# Altium PCB 1.0EV5.2-PCB.PcbDoc
Units mm, origin at the board's own origin, x right, y up, seen from the top; angles counter-clockwise.
Board outline 152.4 x 101.6 mm, 4 copper layers (Top Layer, Signal Layer 1, Signal Layer 2, Bottom Layer), stack 0.778 mm thick; 113 components, 74 nets, 517 pads, 118 vias.
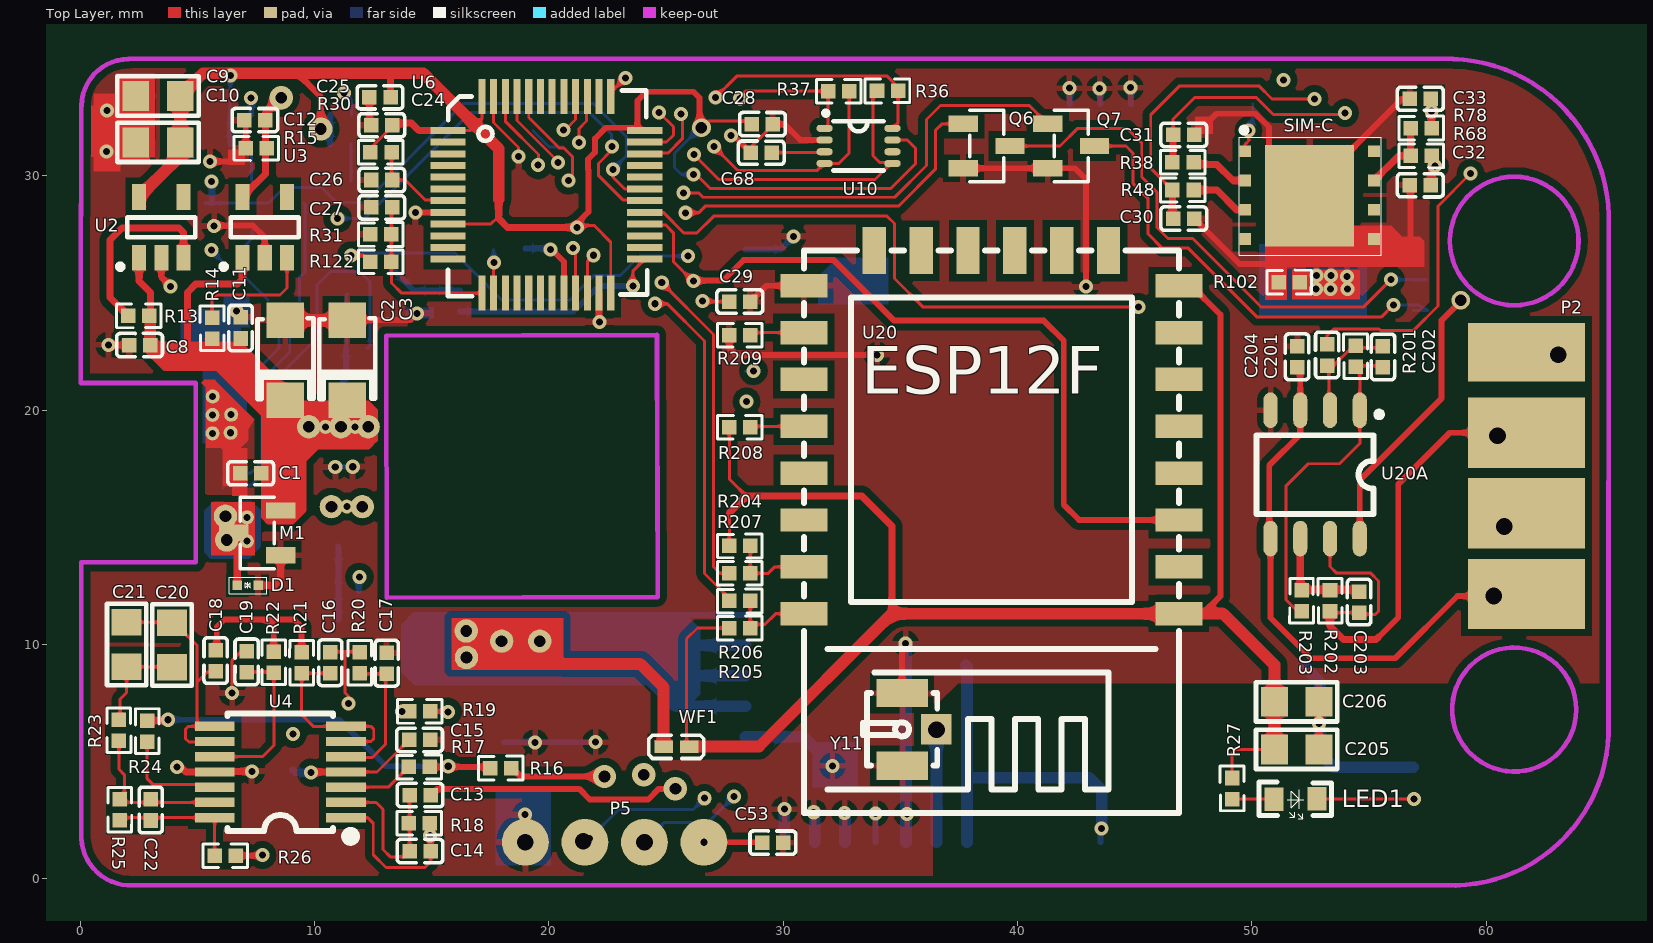
[diagram p0: Top Layer view]
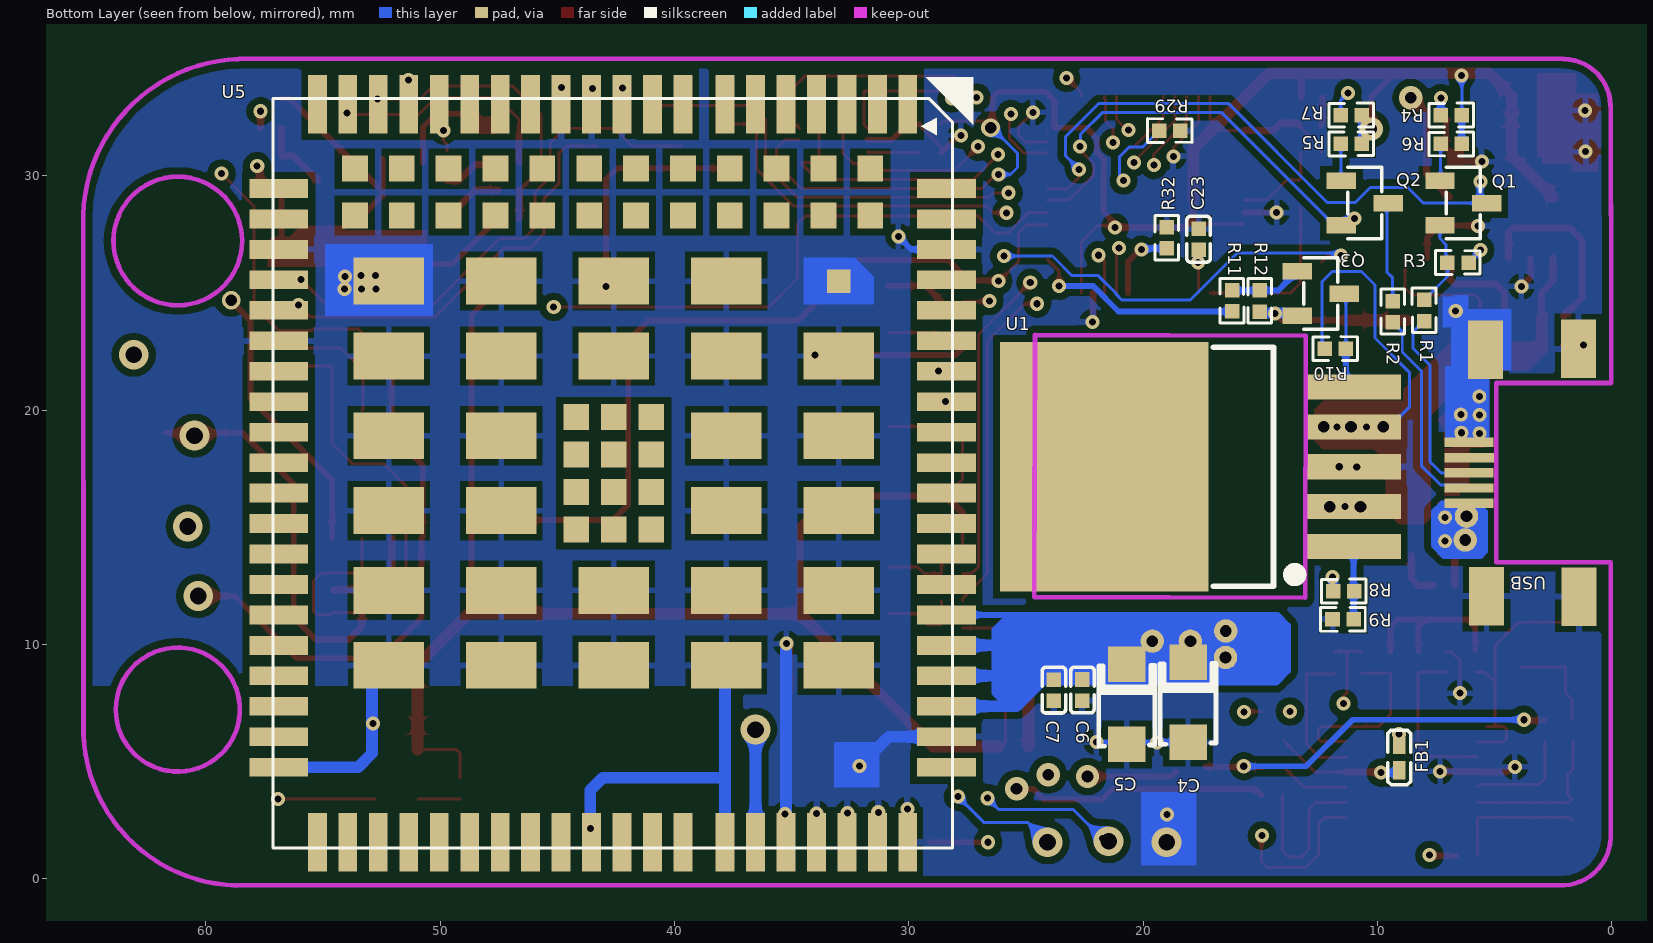
[diagram p1: Bottom Layer view, seen from below]
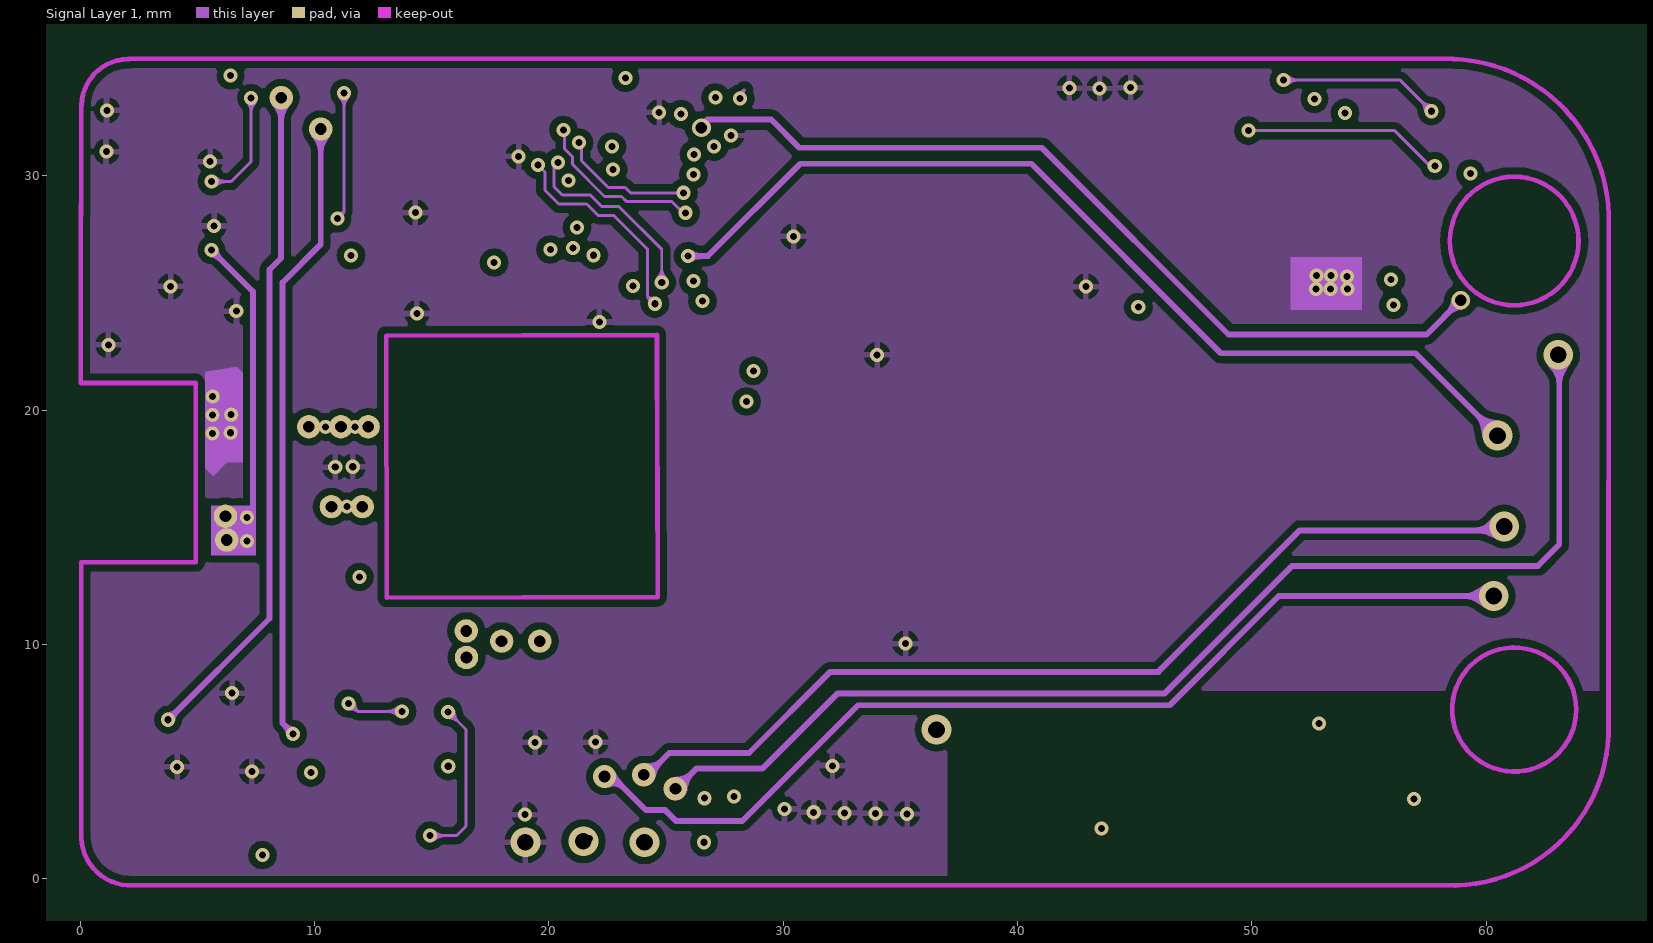
[diagram p2: Signal Layer 1]
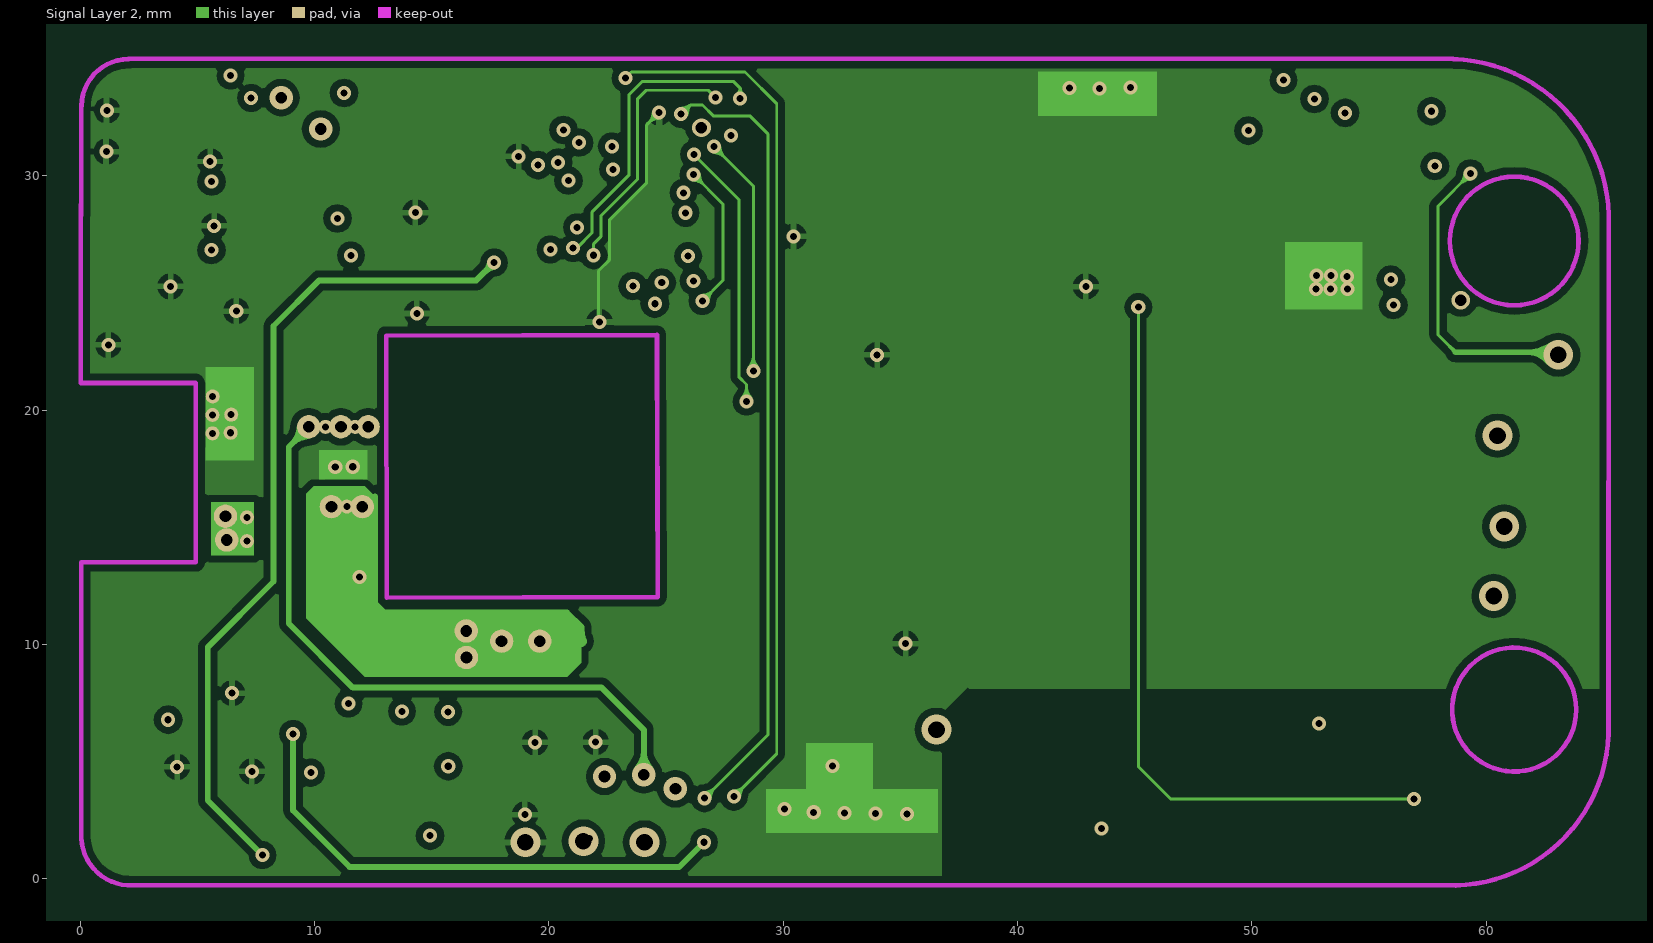
[diagram p3: Signal Layer 2]
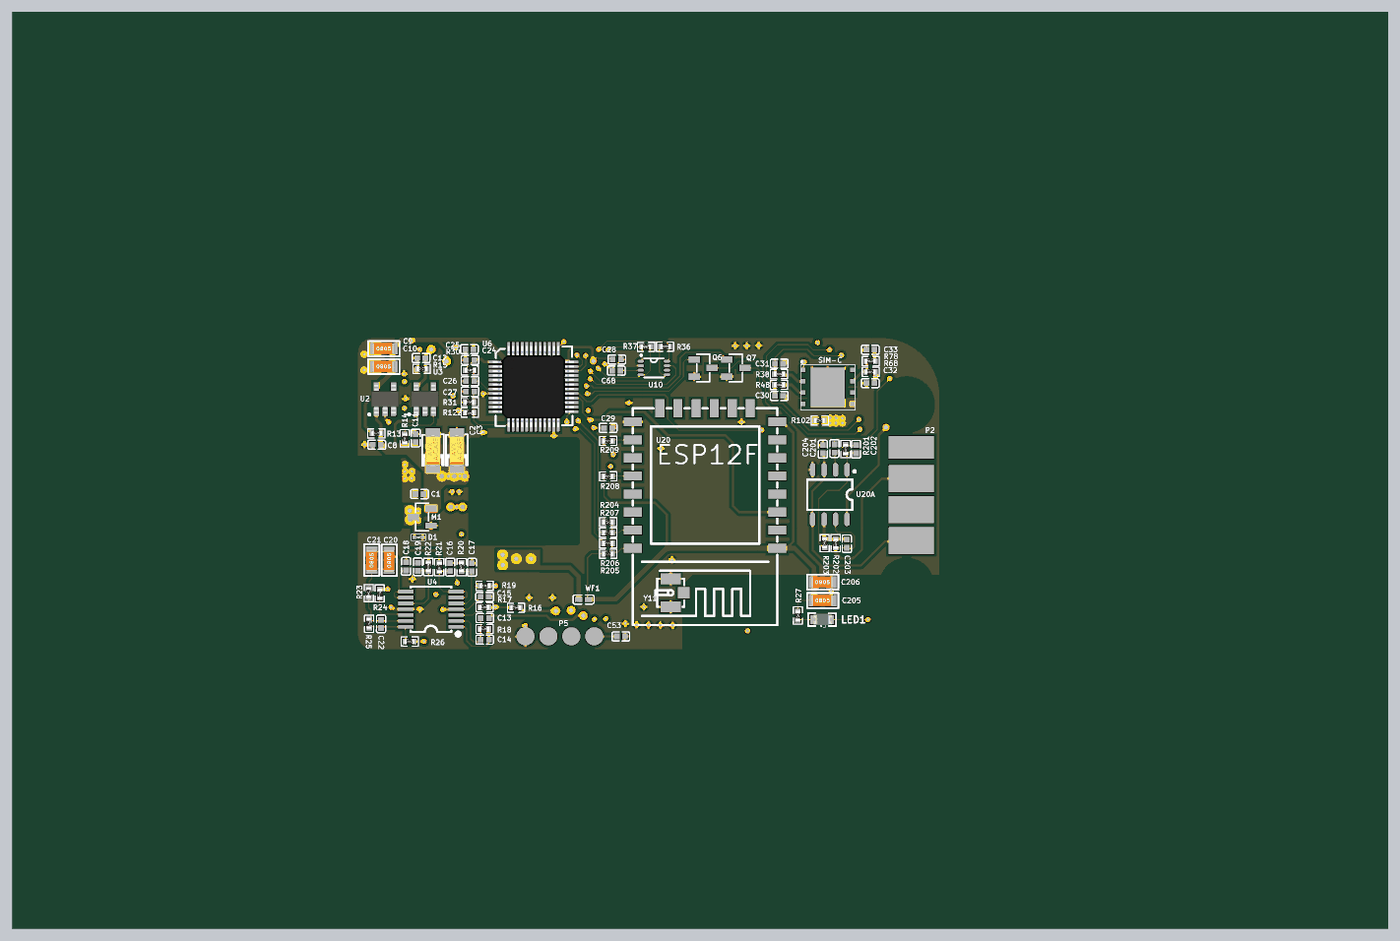
[diagram p4: 3D render of the assembled board from above, using the file's embedded part models]
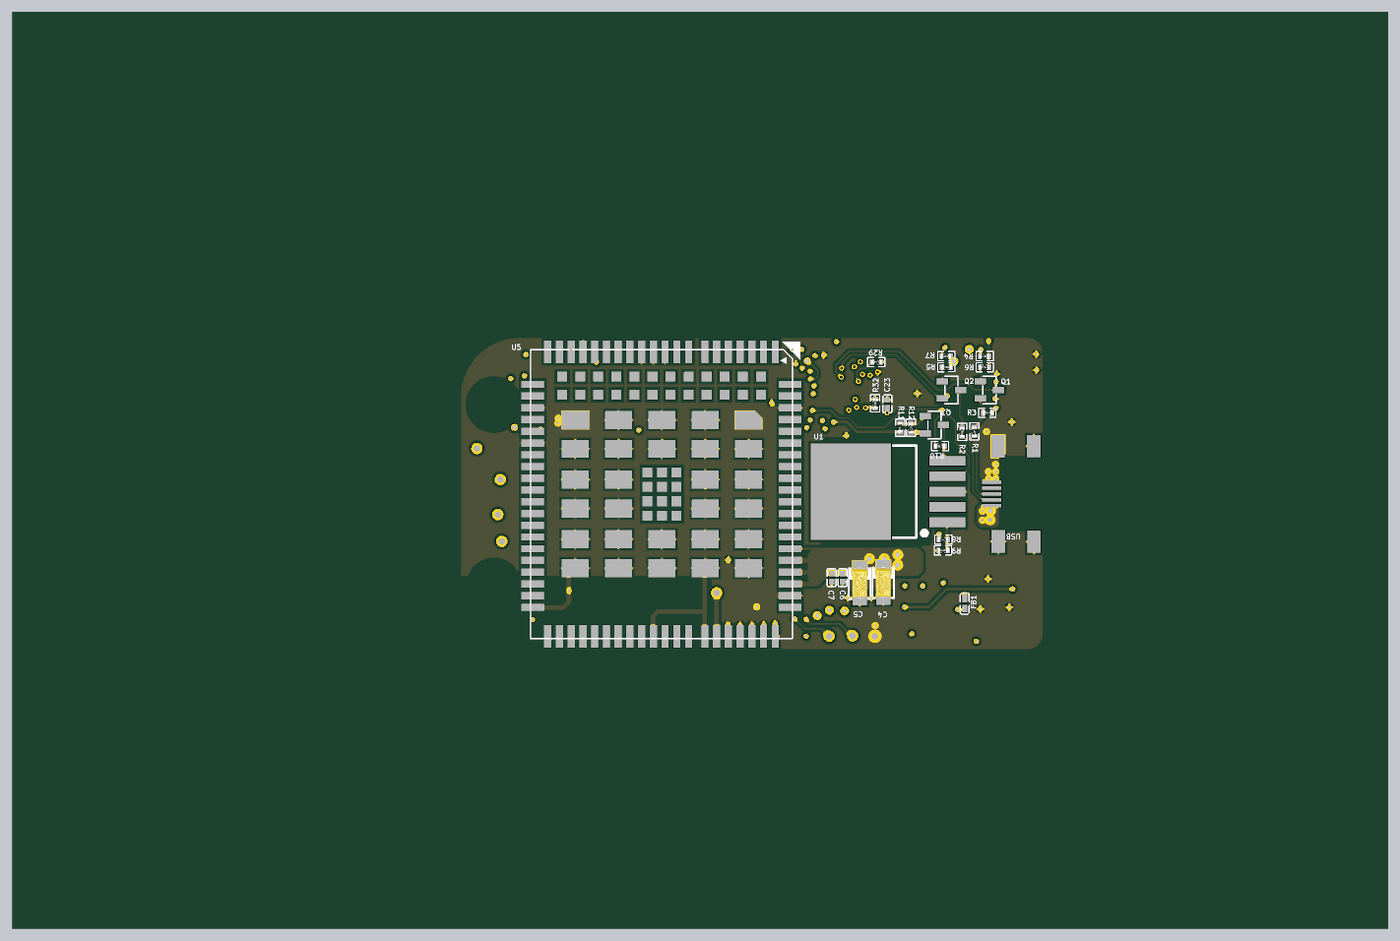
[diagram p5: 3D render of the assembled board from below, using the file's embedded part models]

## Layer stack, top to bottom
Top Solder: solder mask 0.0102, Solder Resist, Dk 3.5
Top Layer: signal copper 0.0356
Dielectric 1: core 0.254, FR-4, Dk 4.2
Signal Layer 1: signal copper 0.036
Dielectric 3: prepreg 0.127, Dk 4.2
Signal Layer 2: signal copper 0.036
Dielectric 2: core 0.254, Dk 4.2
Bottom Layer: signal copper 0.0356
Bottom Solder: solder mask 0.0102, Solder Resist, Dk 3.5

## Board outline
-37.844,-30.849 114.556,-30.849 114.556,70.751 -37.844,70.751

## Design rules (kind name [scope] priority, off if disabled: settings)
Clearance [All] p1: gap=0.3
PolygonConnect [All] p1: connectstyle=Relief reliefconductorwidth=0.254 reliefentries=4 polygonreliefangle="90 Angle" airgapwidth=0.254
RoutingVias [All] p1: holewidth=0.3 width=0.6 viastyle="Through Hole" minholewidth=0.3 minwidth=0.6 maxholewidth=0.3 maxwidth=0.6
SolderMaskExpansion [All] p1: expansion=0.102
Width [All] p1: maxlimit=0.5 minlimit=0.127 preferedwidth=0.25
30 further rules are at their usual default settings.

## Components (designator, comment, footprint, x,y, rotation, side; value= is the part's Value field where it differs from the comment)
C1 "103" C0402 7.284,17.327 r0 top
C2 "47uF/3216" C3216 11.33,22.542 r90 top
C3 "47uF/3216" C3216 8.689,22.542 r90 top
C4 "47uF/3216" C3216 18.015,7.134 r270 bottom
C5 "47uF/3216" C3216 20.627,7.048 r270 bottom
C6 "104" C0402 22.608,8.064 r90 bottom
C7 "103" C0402 23.828,8.061 r90 bottom
C8 "47UF" C0402 2.542,22.796 r0 top
C9 "104" C0805 3.321,33.413 r0 top
C10 "104" C0805 3.321,31.432 r0 top
C11 "47UF" C0402 6.86,23.507 r270 top
C12 "104" C0402 7.462,32.399 r0 top
C13 "10NF" C0402 14.5,3.557 r180 top
C14 "33NF/10V/0402" C0402 14.5,1.17 r180 top
C15 "10NF/10V/0402" C0402 14.492,5.946 r0 top
C16 "33NF" C0402 10.654,9.231 r90 top
C17 "10NF" C0402 13.063,9.212 r90 top
C18 "390NF" C0402 5.763,9.322 r90 top
C19 "33NF" C0402 7.087,9.268 r90 top
C20 "47UF" C0805 3.918,9.979 r90 top
C21 "47UF" C0805 1.98,10.002 r90 top
C22 "3.3NF" C0402 2.993,2.946 r90 top
C23 "10NF" C0402 17.652,27.306 r90 bottom
C24 "0.1uF" C0402 12.799,33.373 r0 top
C25 "0.1uF" C0402 12.877,32.179 r0 top
C26 "104" C0402 12.877,29.843 r0 top
C27 "10NF" C0402 12.877,28.674 r0 top
C28 "0.1uF" C0402 29.11,32.194 r180 top
C29 "0.1uF" C0402 28.145,24.625 r180 top
C30 "33PF_5%_50V_COG" C0402 47.093,28.165 r180 top
C31 "33PF_5%_50V _COG" C0402 47.093,31.737 r180 top
C32 "1UF5%_50v _COG" C0402 57.203,29.619 r0 top
C33 "33PF_5%_50v _COG" C0402 57.203,33.312 r0 top
C53 "104" C0402 29.567,1.562 r0 top
C68 "104" C0402 29.059,30.975 r180 top
C201 "33nF" C0402 53.237,22.352 r270 top
C202 "10NF" C0402 55.618,22.27 r270 top
C203 "10NF" C0402 54.6,11.807 r270 top
C204 "10nF" C0402 51.919,22.288 r90 top
C205 "47uF" C0805 51.919,5.524 r0 top
C206 "22uF" C0805 51.919,7.556 r0 top
D1 "DF2B7AFS/SOD-923" DF2B7AFS 7.114,12.484 r0 top
FB1 "60Ω ±25% @100MHz/0402" "60Ω ±25% @100MHz" 9.095,5.169 r270 bottom
LED1 "RED" LED-0603 51.954,3.434 r180 top
M1 "CES2301" CES2301 7.835,14.818 r0 top locked
P2 "Header 4H" p2 61.259,17.291 r0 top locked
P5 "Header 4H" IO 22.861,1.615 r180 top locked
Q1 "S8050" CES2301 6.616,28.791 r0 bottom locked
Q2 "S8050" CES2301 10.822,28.791 r0 bottom
Q3 "0805" CES2301 12.702,24.93 r0 bottom locked
Q6 "PDTC114YE" CES2301 38.407,31.229 r180 top
Q7 "PDTC114YE" CES2301 42.013,31.229 r180 top
R1 "51R" R0402 7.977,24.269 r270 bottom
R2 "51R" R0402 9.313,24.224 r270 bottom
R3 "100k" R0402 6.575,26.338 r180 bottom
R4 "10K" R0402 6.84,31.331 r0 bottom
R5 "10K" R0402 11.126,31.403 r180 bottom
R6 "NP" R0402 6.84,32.564 r0 bottom
R7 "100K" R0402 11.107,32.564 r0 bottom
R8 "100k" R0402 11.426,12.244 r0 bottom
R9 "47k" R0402 11.483,11.112 r180 bottom
R10 "51K" R0402 11.787,22.593 r0 bottom
R11 "10k" R0402 16.243,24.656 r90 bottom
R12 "4.7k" R0402 14.988,24.676 r270 bottom
R13 "100K" R0402 2.488,24.066 r0 top
R14 "100K" R0402 5.662,23.507 r270 top
R15 "100k" R0402 7.5,31.215 r0 top
R16 "10K" R0402 17.959,4.692 r180 top (schematic designator R17)
R17 "10K" R0402 14.479,4.74 r180 top
R18 "7.5M/0402" R0402 14.479,2.338 r180 top
R19 "200K" R0402 14.474,7.186 r0 top
R20 "220K" R0402 11.891,9.218 r90 top
R21 "470K" R0402 9.487,9.238 r270 top
R22 "620K" R0402 8.226,9.236 r90 top
R23 "100K" R0402 1.616,6.333 r90 top
R24 "0R" R0402 2.894,6.318 r270 top
R25 "7.5M" R0402 1.655,2.937 r90 top
R26 "1k" R0402 6.199,0.952 r180 top
R27 "7.5M/0402" R0402 49.199,3.868 r270 top (schematic designator R18)
R29 "100k" R0402 18.884,31.97 r180 bottom
R30 "100k" R0402 12.824,31.047 r0 top
R31 "10k" R0402 12.843,27.469 r180 top
R32 "100k" R0402 18.96,27.37 r270 bottom
R36 "NP" R0402 34.444,33.667 r0 top
R37 "NP" R0402 32.381,33.58 r180 top
R38 "330R" R0402 47.053,30.619 r0 top
R48 "330R" R0402 47.053,29.437 r0 top
R68 "10K" R0402 57.242,30.823 r180 top
R78 "330R" R0402 57.242,32.005 r180 top
R102 "0R" R0402 51.608,25.431 r180 top
R122 "10k" R0402 12.843,26.301 r180 top
R201 "20M" R0402 54.468,22.32 r270 top
R202 "20M" R0402 53.378,11.88 r270 top
R203 "10k" R0402 52.094,11.854 r90 top
R204 "10K" R0402 28.165,14.175 r180 top
R205 "10K" R0402 28.165,10.669 r180 top
R206 "22R" R0402 28.165,11.823 r180 top
R207 "22R" R0402 28.165,13.006 r180 top
R208 "4.7K" R0402 28.165,19.24 r180 top
R209 "1K" R0402 28.165,23.166 r180 top
SIM-C "M2M SIM" "M2M SIM" 52.486,29.266 r0 top locked
U1 "MIC29302WU/ TO-263-5" MIC29302WU 19.966,17.767 r0 bottom locked
U2 "XC6504A331MR-G/SOT-25" XC6504A331MR 3.465,27.789 r90 top locked
U3 "XC6504A151MR-G/SOT-25" XC6504A331MR 7.879,27.789 r90 top locked
U4 "SGM8634XTS14/TR/ TSSOP-14" SGM8634XTS14 8.689,4.508 r90 top
U5 "EC20" EC20 42.201,18.16 r180 bottom locked
U6 "stm32f303c8t6/ LQFP-48_7x7x05P" LQFP-48 19.894,29.197 r0 top locked
U10 "TXS0102DCUR/ VSSOP-8" TXS0102DCUR 33.174,31.322 r270 top
U20 "ESP-12F" ESP-12F 37.763,16.879 r180 top locked
U20A "LM358H-SR/ SOP-8" LM358H-SR 52.86,17.305 r180 top locked
USB "USB-B(Mini)" USB-B(Mini) 5.998,17.124 r0 bottom locked
WF1 "60Ω ±25% @100MHz/0402" "60Ω ±25% @100MHz" 25.429,5.66 r180 top
Y11 "3310472280/SMD" Y11 35.054,6.337 r180 top

## Footprints (in the part's own frame and the unit in brackets; to place one, negate y for a bottom-side part, rotate by r counter-clockwise, add the part's x,y. Pads: shape width x height; smd on the part's side, far side on the other; paste and mask are expansions set on the pad)
"60Ω ±25% @100MHz" [mm]
  rect 0.79x0.54 smd: 1(-0.557,0.024) 2(0.533,0.024)
  silkscreen extent -1.18,-0.47 1.16,0.52
C0402 [mm]
  rect 0.62x0.62 smd: 1(-0.456,-0.016) 2(0.444,-0.016)
  silkscreen extent -0.98,-0.52 0.97,0.48
C0805 [mm] "Chip Capacitor, Body 2.0x1.3mm, IPC High Density"
  rect 1.14x1.27 smd: 1(-0.95,0) 2(0.95,0)
  silkscreen extent -1.74,-0.84 1.74,0.84, body extent -1.32,-0.62 1.19,0.62, height 0.77
C3216 [mm]
  rect 1.52x1.6 smd: 1(-2.115,-0.071) 2(1.305,-0.071)
  silkscreen extent -2.06,-1.26 1.39,1.12, body extent -2.11,-0.91 1.29,0.77, height 1.71
CES2301 [mm]
  rect 1.25x0.7 smd: 1(0.72,-0.999) 2(0.72,0.901) 3(-1.28,-0.049)
  silkscreen extent -1.01,-1.57 0.45,1.48
DF2B7AFS [mm]
  rect 0.4x0.4 smd: 1(-0.412,0.041) 2(0.488,0.041)
  silkscreen extent -0.76,-0.31 0.84,0.39
EC20 [mm]
  rect 0.8x2.5 smd mask+0.05: 1(12.157,14.904) 2(10.857,14.904) 3(9.557,14.904) 4(8.257,14.904) 5(6.957,14.904) 6(5.657,14.904) 7(4.357,14.904) 8(-0.043,14.904) 9(-1.343,14.904) 10(-2.643,14.904) 11(-3.943,14.904) 12(-5.243,14.904) 13(-6.543,14.904) 14(-7.843,14.904) 15(-9.143,14.904) 16(-10.443,14.904) 17(-11.743,14.904) 18(-13.043,14.904) 37(-13.043,-16.596) 38(-11.743,-16.596) 39(-10.443,-16.596) 40(-9.143,-16.596) 41(-7.843,-16.596) 42(-6.543,-16.596) 43(-5.243,-16.596) 44(-3.943,-16.596) 45(-2.643,-16.596) 46(-1.343,-16.596) 47(-0.043,-16.596) 48(4.357,-16.596) 49(5.657,-16.596) 50(6.957,-16.596) 51(8.257,-16.596) 52(9.557,-16.596) 53(10.857,-16.596) 54(12.157,-16.596) 141(2.557,14.904) 142(1.257,14.904) 143(1.257,-16.596) 144(2.557,-16.596)
  rect 2.5x0.8 smd mask+0.05: 19(-14.693,8.704) 20(-14.693,7.404) 21(-14.693,6.104) 22(-14.693,4.804) 23(-14.693,3.504) 24(-14.693,2.204) 25(-14.693,0.904) 26(-14.693,-0.396) 27(-14.693,-1.696) 28(-14.693,-2.996) 29(-14.693,-4.296) 30(-14.693,-5.596) 31(-14.693,-6.896) 32(-14.693,-8.196) 33(-14.693,-9.496) 34(-14.693,-10.796) 35(-14.693,-12.096) 36(-14.693,-13.396) 55(13.807,-13.396) 56(13.807,-12.096) 57(13.807,-10.796) 58(13.807,-9.496) 59(13.807,-8.196) 60(13.807,-6.896) 61(13.807,-5.596) 62(13.807,-4.296) 63(13.807,-2.996) 64(13.807,-1.696) 65(13.807,-0.396) 66(13.807,0.904) 67(13.807,2.204) 68(13.807,3.504) 69(13.807,4.804) 70(13.807,6.104) 71(13.807,7.404) 72(13.807,8.704) 113(13.807,10.004) 114(13.807,11.304) 115(-14.693,10.004) 116(-14.693,11.304)
  rect 1.1x1.1 smd mask+0.05: 73(1.207,-3.246) 74(-0.393,-3.246) 75(-1.993,-3.246) 76(1.207,-1.646) 77(-0.393,-1.646) 78(-1.993,-1.646) 79(1.207,-0.046) 80(-0.393,-0.046) 81(-1.993,-0.046) 82(1.207,1.554) 83(-0.393,1.554) 84(-1.993,1.554) 117(10.557,10.154) 118(8.557,10.154) 119(6.557,10.154) 120(4.557,10.154) 121(2.557,10.154) 122(0.557,10.154) 123(-1.443,10.154) 124(-3.443,10.154) 125(-5.443,10.154) 126(-7.443,10.154) 127(-9.443,10.154) 128(-11.443,10.154) 129(10.557,12.154) 130(8.557,12.154) 131(6.557,12.154) 132(4.557,12.154) 133(2.557,12.154) 134(0.557,12.154) 135(-1.443,12.154) 136(-3.443,12.154) 137(-5.443,12.154) 138(-7.443,12.154) 139(-9.443,12.154) 140(-11.443,12.154)
  rect 3x2 smd mask+0.05: 85(9.207,-9.046) 86(4.407,-9.046) 87(-0.393,-9.046) 88(-5.193,-9.046) 89(-9.993,-9.046) 90(9.207,-5.846) 91(4.407,-5.846) 92(-0.393,-5.846) 93(-5.193,-5.846) 94(-9.993,-5.846) 95(9.207,-2.446) 96(4.407,-2.446) 97(-5.193,-2.446) 98(-9.993,-2.446) 99(9.207,0.754) 100(4.407,0.754) 101(-5.193,0.754) 102(-9.993,0.754) 103(9.207,4.154) 104(4.407,4.154) 105(-0.393,4.154) 106(-5.193,4.154) 107(-9.993,4.154) 109(4.407,7.354) 110(-0.393,7.354) 111(-5.193,7.354) 112(-9.993,7.354)
  rect 1x1 smd mask+0: 108(9.207,7.354)
  Top Layer region: 10.707,7.529 10.707,6.354 7.707,6.354 7.707,8.354 9.882,8.354
  silkscreen extent -14.94,-16.85 14.95,16.05
ESP-12F [mm]
  rect 2x1 smd: 1(-9.127,5.564) 2(-9.127,3.564) 3(-9.127,1.564) 4(-9.127,-0.436) 5(-9.127,-2.436) 6(-9.127,-4.436) 7(-9.127,-6.436) 8(-9.126,-8.436) 9(6.873,-8.436) 10(6.875,-6.436) 11(6.876,-4.436) 12(6.875,-2.436) 13(6.875,-0.436) 14(6.875,1.564) 15(6.875,3.564) 16(6.875,5.564)
  rect 1x2 smd: 17(-6.125,-9.937) 18(-4.127,-9.936) 19(-2.129,-9.936) 20(-0.128,-9.936) 21(1.871,-9.936) 22(3.871,-9.937)
  silkscreen extent -9.13,-9.94 6.87,14.06
IO [mm]
  round 2 smd: 1(-3.76,0.053) 2(-1.22,0.053) 3(1.32,0.053) 4(3.86,0.053)
LED-0603 [mm]
  rect 0.8x1 smd: 1(1.003,0.03) 2(-0.827,0.024)
  silkscreen extent -1.45,-0.7 1.65,0.87, body extent -0.98,-0.62 1.04,0.63, height 1.1
LM358H-SR [mm]
  oval 0.6x1.52 smd: 1(-1.752,-2.697) 2(-0.482,-2.697) 3(0.788,-2.697) 4(2.058,-2.697) 5(2.058,2.783) 6(0.788,2.783) 7(-0.482,2.783) 8(-1.752,2.783)
  silkscreen extent -2.7,-2.64 2.65,1.74
LQFP-48 [mm]
  rect 1.5x0.3 smd: 1(-4.2,2.75) 2(-4.2,2.25) 3(-4.2,1.75) 4(-4.2,1.25) 5(-4.2,0.75) 6(-4.2,0.25) 7(-4.2,-0.25) 8(-4.2,-0.75) 9(-4.2,-1.25) 10(-4.2,-1.75) 11(-4.2,-2.25) 12(-4.2,-2.75) 25(4.2,-2.75) 26(4.2,-2.25) 27(4.2,-1.75) 28(4.2,-1.25) 29(4.2,-0.75) 30(4.2,-0.25) 31(4.2,0.25) 32(4.2,0.75) 33(4.2,1.25) 34(4.2,1.75) 35(4.2,2.25) 36(4.2,2.75)
  rect 0.3x1.5 smd: 13(-2.75,-4.2) 14(-2.25,-4.2) 15(-1.75,-4.2) 16(-1.25,-4.2) 17(-0.75,-4.2) 18(-0.25,-4.2) 19(0.25,-4.2) 20(0.75,-4.2) 21(1.25,-4.2) 22(1.75,-4.2) 23(2.25,-4.2) 24(2.75,-4.2) 37(2.75,4.2) 38(2.25,4.2) 39(1.75,4.2) 40(1.25,4.2) 41(0.75,4.2) 42(0.25,4.2) 43(-0.25,4.2) 44(-0.75,4.2) 45(-1.25,4.2) 46(-1.75,4.2) 47(-2.25,4.2) 48(-2.75,4.2)
  silkscreen extent -4.2,-4.34 4.31,4.45, body extent -4.5,-4.5 4.5,4.5, height 1.57
"M2M SIM" [mm]
  rect 3.8x4.35 smd: 0(-0.014,-0.109)
  rect 0.5x0.5 smd: 1(-2.764,1.791) 2(-2.764,0.541) 3(-2.764,-0.709) 4(-2.764,-1.959) 5(2.736,-1.959) 6(2.736,-0.709) 7(2.736,0.541) 8(2.736,1.791)
  silkscreen extent -3.01,-2.66 3.04,2.8
MIC29302WU [mm]
  rect 4x1.069 smd: 1(-8.968,3.578) 2(-8.968,1.879) 3(-8.968,0.179) 4(-8.968,-1.521) 5(-8.968,-3.221)
  rect 8.89x10.66 smd: 6(1.7,0.179)
  silkscreen extent -6.68,-4.92 -2.98,5.28
p2 [mm]
  rect 5x3 smd: 1(0.465,-5.129) 2(0.465,-1.692) 3(0.465,1.746)
  rect 5x2.5 smd: 4(0.465,5.183)
R0402 [mm]
  rect 0.62x0.62 smd: 1(-0.437,-0.036) 2(0.463,-0.036)
  silkscreen extent -0.94,-0.54 0.96,0.47, body extent -0.52,-0.28 0.63,0.27, height 0.41
SGM8634XTS14 [mm]
  rect 0.4x1.7 smd: 1(-1.896,-2.651) 2(-1.246,-2.651) 3(-0.596,-2.651) 4(0.054,-2.651) 5(0.704,-2.651) 6(1.354,-2.651) 7(2.004,-2.651) 8(2.004,2.949) 9(1.354,2.949) 10(0.704,2.949) 11(0.054,2.949) 12(-0.596,2.949) 13(-1.246,2.949) 14(-1.896,2.949)
  silkscreen extent -2.9,-3.05 2.55,2.4
TXS0102DCUR [mm]
  oval 0.3x0.7 smd: 1(-0.711,-1.406) 2(-0.211,-1.406) 3(0.289,-1.406) 4(0.789,-1.406) 5(0.789,1.494) 6(0.289,1.494) 7(-0.211,1.494) 8(-0.711,1.494)
  silkscreen extent -1.46,-1.45 1.09,1.11
USB-B(Mini) [mm]
  rect 2.1x0.4 smd: 1(0.091,1.087) 2(0.095,0.443) 3(0.094,-0.203) 4(0.088,-0.854) 5(0.099,-1.506)
  rect 1.5x2.5 smd: 5(-4.596,5.078) 5(-4.572,-5.499) 5(-0.652,5.058) 5(-0.615,-5.464)
XC6504A331MR [mm]
  rect 1.1x0.6 smd: 1(-1.285,0.954) 2(-1.285,0.004) 3(-1.285,-0.946) 4(1.315,-0.946) 5(1.315,0.954)
  silkscreen extent -1.71,-1.45 0.44,1.81, body extent -1.56,-1.55 1.64,1.55, height 1.45
Y11 [mm]
  rect 2.2x1.2 smd: 1(-0.025,-1.592) 3(-0.025,1.508)
  rect 1.3x1.3 smd: 2(-1.473,-0.043)
  silkscreen extent -1.53,-1.59 1.65,1.51

## Part data
C1 C6 C7 C8 C9 C10 C11 C12: library part C0603, "电容"
C2 C3 C4 C5: library part "C Pol", "极性电容"
C13 C14 C15 C16 C17 C18 C19 C20 C21 C22 C23: library part C0402, "电容"
C24 C25 C26 C27 C28 C29 C30 C31 C32 C33 C53 C68: library part Cap, "Capacitor"
C201 C202 C203 C204: library part 0.1u
C205 C206: library part Cap8, "无极性电容"
D1: library part DF2B7AFS,L3M
FB1 WF1: library part L-Beads, "磁珠"
LED1: library part LED0, "发光二极管"
M1: library part MOSFET-P, "P-Channel MOSFET"
P2 P5: "Header, 4-Pin, Right Angle"
Q1 Q2 Q3: library part NPN, "8050/BCW846/BCW847"
R1 R2 R3 R4 R5 R6 R7 R8 R9 R10 R13 R14 R15 R16 R17 R18 R19 R20 R21 R22 R23 R24 R25 R26 R27 R31 R122: library part RES0402, "电阻"
R11 R12 R29 R30 R32 R36 R37: library part Res2, "Resistor"
R38 R48 R68 R78 R102 R204 R205 R206 R207 R208 R209: library part Res4, "R0402贴片电阻"
R201: library part 7.5M
R202: library part 1k
R203: library part 100k
SIM-C: library part SIM-CARD-1.5H
U1: library part MIC29150, "MIC29302WU/5-Pin TO-263"
U2 U3: library part XC6504-1.5
U4: library part SGM8634, "SGM8634XTS14/TR  TSSOP-14"
U5: library part EC20_YY
U6: library part STM32F103
U10: library part TXS0102DCUR
U20: "8266"
U20A: library part LM393M
USB: library part USB5
Y11: library part UFL-R-SMT-1_0

## Free pads (board coordinates)
  round 0.005 on Keep-Out: 1(60.203,29.638)
  round 0.2 on Keep-Out: 1(65.241,27.876) 1(65.241,27.876)
  round 0.6 hole 0.3: 2(5.643,19.016) 2(5.643,19.8) 2(5.655,20.59) 2(6.421,19.04) 2(6.445,19.812) 2(7.114,14.414) 2(7.114,15.43) 2(10.467,19.291) 2(11.381,15.887) 2(11.737,19.291)
  round 1 hole 0.5: 2(6.199,15.481) 2(6.25,14.465) 2(9.755,19.291) 2(10.721,15.887) 2(11.127,19.291) 2(12.041,15.887) 2(12.288,19.291) 2(16.471,10.581) 2(16.486,9.449) 2(17.985,10.147) 2(19.611,10.147)

## Via types
v1: diameter 0.6, hole 0.3, Top Layer to Bottom Layer, 103 vias
v2: diameter 1.27, hole 0.711, Top Layer to Bottom Layer, 8 vias
v3: diameter 1, hole 0.5, Top Layer to Bottom Layer, 5 vias
v4: diameter 0.8, hole 0.5, Top Layer to Bottom Layer, 2 vias

## Nets (pads, with @x,y where several pads share a name; then routed paths per layer and width w, separated by ;. In a path a pad name is that pad's centre, name@x,y a point inside that pad or via, vN(x,y) a via of type N, cw(c..) or ccw(c..) an arc to the next point about the centre after c; other vN are vias at no path point)
1V5: C12.2 R15.2 R16.2 R17.1 R24.1 U3.5 | length 49.6
  Top Layer w0.25: R24.1 3.718,6.756 v1(3.754,6.791) ; R17.1 R16.2@17.339,4.777
  Top Layer w0.3: U3.5 7.907,30.086 C12.2 7.907,32.676 v3(8.574,33.344)
  Signal Layer 1 w0.25: v1(3.754,6.791) 8.079,11.116 8.079,26 8.574,26.496 v3(8.574,33.344)
  Bottom Layer w0.25: v1(3.754,6.791) 11.061,6.791 13.046,4.806 v1(15.707,4.806)
1V8: C68.1 U10.3 | length 2.3
  Top Layer w0.127: C68.1 29.515,31 31.735,31 U10.3
3V3: C9.2 C10.2 C24.2 C25.2 C28.2 C29.2 C53.1 FB1.1 P5.1 R4.1 R5.2 R6.1 R7.1 R30.1 U2.5 U6.1 U6.9 U6.24 U6.36 U6.48 U10.7 U20A.8 | length 184.9
  Top Layer w0.127: R30.1 12.387,31.18 C25.2@13.346,32.139 ; U6.9 17.526,27.947 17.811,28.232 17.862,28.181 ; U6.1 16.649,31.947 16.863,32.16 17.144,32.441 U6.48 ; v1@21.066,27.893 21.202,27.893 v1@21.287,27.893 ; v1(21.202,27.803) 21.202,27.808 v1@21.287,27.893 ; U6.24 22.644,27.175 21.925,27.893 v1@21.287,27.893 ; U6.36@24.061,31.915 U6.36 ; v1(26.17,30.065) 26.288,30.065 26.881,29.472 34.607,29.472 35.645,30.51 35.645,31.19 35.302,31.533 U10.7 ; v4(26.512,32.058) 26.798,32.344 28.531,32.344 C28.2 ; v1(26.556,24.66) 26.599,24.66 26.618,24.641 C29.2
  Top Layer w0.25: 9.266,34.384 10.267,33.384 v3(10.267,32.005) ; v1@21.202,27.808 21.202,27.893 21.202,27.978 21.688,28.464 21.688,30.256 21.673,30.271 21.673,30.715 21.967,31.009 21.967,31.592 22.434,32.059 23.782,32.059 23.782,33.215 24.161,33.593 26.178,33.593 26.431,33.341 26.431,32.349 26.512,32.268 v4(26.512,32.058) ; v1(26.621,1.562) 29.096,1.562 C53.1 ; U20A.8 54.612,17.011 58.108,20.507 58.108,23.842 58.924,24.659 v4(58.924,24.694)
  Top Layer w0.3: 13.225,34.384 13.244,34.365 C24.2 ; C25.2 13.41,32.252 14.146,32.252 14.45,31.947 U6.1 ; 17.862,29.007 17.862,28.181 18.24,27.803 v1(21.202,27.803)
  Top Layer w0.5: U2.5 4.271,30.864 C10.2 C9.2 5.242,34.384 9.266,34.384 13.225,34.384 14.639,34.384 16.863,32.16 17.862,31.161 17.862,29.007
  Signal Layer 1 w0.25: v1(9.087,6.188) 8.632,6.643 8.632,25.446 10.267,27.081 v3(10.267,32.005) ; v4@26.625,32.269 26.762,32.406 29.491,32.406 30.691,31.205 41.043,31.205 49.011,23.237 57.467,23.237 v4(58.924,24.694)
  Signal Layer 2 w0.127: v1(21.202,27.803) 21.202,27.872 v1@21.308,27.978 ; v1(26.17,30.065) 27.429,28.807 27.429,25.533 v1(26.556,24.66)
  Signal Layer 2 w0.25: v1(9.087,6.188) 9.087,2.915 11.5,0.502 25.561,0.502 v1(26.621,1.562)
  Bottom Layer w0.127: R6.1 6.403,34.269 v1(6.418,34.284) ; R7.1@10.644,32.627 R7.1 ; v1(26.17,30.065) 25.658,30.065 25.362,30.361 25.362,30.965 26.512,32.114 v4(26.512,32.058)
  Bottom Layer w0.25: R4.1 R6.1 ; R5.2 10.67,31.373 R7.1
3V3D: C15.1 FB1.2 U4.4 | length 5.6
  Top Layer w0.127: U4.4 12.669,4.563 C15.1
  Top Layer w0.3: v1(9.848,4.531) 9.88,4.563 U4.4
  Bottom Layer w0.3: FB1.2 9.176,4.531 v1(9.848,4.531)
11: LED1.1 R27.2 | length 1.8
  Top Layer w0.127: R27.2@49.163,3.404 LED1.1
ADC-PA3: C203.2 P2.3 R122.2 R202.2 U20A.7 | length 81.3
  Top Layer w0.127: v1(11.555,26.61) 12.108,26.61 R122.2 ; R202.2 53.396,11.362 C203.2 54.656,11.291 55.286,11.291 55.415,11.419 55.415,12.711 55.064,13.062 53.607,13.062 53.342,13.327 U20A.7
  Top Layer w0.25: 55.416,10.314 56.254,11.152 56.254,16.84 58.451,19.037 P2.3
  Top Layer w0.3: R202.2 53.342,10.784 53.917,10.208 55.31,10.208 55.416,10.314
  Signal Layer 1 w0.25: v1(25.949,26.58) 26.788,26.58 30.728,30.52 40.598,30.52 48.683,22.435 56.991,22.435 v2@60.444,18.982
  Bottom Layer w0.127: v1(11.555,26.61) 11.555,26.69 11.528,26.717 15.979,26.717 17.997,24.699 20.904,24.699 21.152,24.946 21.152,24.98 21.914,25.741 21.947,25.741 23.036,25.742 23.875,26.58 v1(25.949,26.58)
  other v2: 60.492,18.918
ADC-PA4: C23.1 R26.1 U6.14 | length 38.3
  Top Layer w0.127: U6.14 17.644,26.282 v1(17.666,26.304)
  Top Layer w0.25: R26.1 7.753,0.989 v1(7.775,1.011)
  Signal Layer 2 w0.25: v1(7.775,1.011) 5.446,3.341 5.446,9.882 8.253,12.689 8.253,23.595 10.201,25.543 16.905,25.543 v1(17.666,26.304)
  Bottom Layer w0.127: C23.1 17.637,26.334 v1(17.666,26.304)
DC5V: C1.2 C2.1 C3.1 C8.2 C11.2 M1.2 P2.2 pad.2@9.755,19.291 pad.2@10.467,19.291 pad.2@11.127,19.291 pad.2@11.737,19.291 pad.2@12.288,19.291 R10.2 R13.2 R14.2 U1.4 U2.1 U3.1 | length 128.2
  Top Layer w0.127: 2.796,23.304 2.796,22.542 3.609,21.729 5.844,21.729 7.825,19.748 8.081,19.748 8.64,20.307 C3.1 ; R14.2@5.341,23.045 R14.2 ; C11.2@6.73,22.949 C11.2
  Top Layer w0.2: 7.825,15.43 7.825,19.748 7.825,19.85 8.282,20.307 8.64,20.307 12.295,20.307 12.601,20.001 12.601,18.734 12.295,18.427 10.111,18.427 9.552,17.869 9.552,15.735 9.044,15.227 8.028,15.227 7.825,15.43
  Top Layer w0.3: U2.1 2.512,25.519 2.999,25.031 2.999,23.558 ; C8.2 4.574,22.781 ; U3.1 6.926,25.605 6.707,25.387 4.929,25.387 4.574,25.031 4.574,22.781 ; C3.1 8.76,20.846 6.825,22.781 4.574,22.781
  Top Layer w0.5: R13.2 2.986,23.995 C8.2 ; pad.2@9.755,19.291 10.467,19.291 pad.2@11.127,19.291 ; pad.2@12.288,19.291 pad.2@12.451,19.291
  Signal Layer 1 w0.25: v3@24.352,4.585 25.14,5.372 28.546,5.372 32.008,8.834 46.014,8.834 52.056,14.875 60.73,14.875 v2@60.833,14.978
  Signal Layer 2 w0.25: pad.2@9.755,19.291 8.898,18.434 8.898,10.899 11.636,8.161 22.254,8.161 24.056,6.36 v3(24.056,4.446)
  Bottom Layer w0.127: U1.4 9.483,19.288 8.624,20.146 8.624,21.598 10.109,23.082 10.109,25.349 10.686,25.926 11.925,25.926 12.364,25.487 12.364,22.744 R10.2
  other v2: 60.774,15.038
EC20-RXD: R37.1 U5.68 U10.4 | length 19.7
  Top Layer w0.127: v1(27.052,31.249) 28.066,30.234 31.47,30.234 U10.4 32.376,30.533 32.819,30.975 R37.1
  Signal Layer 2 w0.127: v1(27.052,31.249) 28.729,29.571 v1(28.729,21.684)
  Bottom Layer w0.127: U5.68 28.71,21.665 v1(28.729,21.684)
EC20-TXD: R36.1 U5.67 U10.5 | length 24.5
  Top Layer w0.127: v1(26.19,30.919) 27.255,29.853 33.923,29.853 34.636,30.566 34.134,30.566 33.835,30.865 33.835,33.459 R36.1
  Signal Layer 2 w0.127: v1(26.19,30.919) 28.112,28.997 28.112,21.428 28.438,21.102 v1(28.438,20.372)
  Bottom Layer w0.127: U5.67 28.415,20.344 28.415,20.349 v1(28.438,20.372)
GND: C1.1 C2.2 C3.2 C4.2 C5.2 C6.1 C7.1 C8.1 C9.1 C10.1 C11.1 C12.1 C15.2 C17.2 C19.2 C23.2 C24.1 C25.1 C26.1 C27.1 C28.1 C29.1 C30.1 C31.1 C32.1 C33.1 C53.2 C68.2 C204.2 C205.2 C206.2 D1.2 M1.1 P5.4 pad.2@5.643,19.8 pad.2@5.643,19.016 pad.2@5.655,20.59 pad.2@6.421,19.04 pad.2@6.445,19.812 Q3.2 Q6.2 Q7.2 R9.1 R12.2 R15.1 R29.2 R31.2 R32.1 R102.1 R102.2 R209.2 SIM-C.0 SIM-C.5 U1.3 U2.2 U3.2 U4.11 U5.8 U5.9 U5.10 U5.19 U5.22 U5.36 U5.46 U5.48 U5.50 U5.51 U5.52 U5.53 U5.54 U5.56 U5.72 U5.85 U5.86 U5.87 U5.88 U5.89 U5.90 U5.91 U5.92 U5.93 U5.94 U5.95 U5.96 U5.97 U5.98 U5.99 U5.100 U5.101 U5.102 U5.103 U5.104 U5.105 U5.106 U5.107 U5.108 U5.109 U5.110 U5.111 U5.112 U6.8 U6.23 U6.35 U6.47 U10.2 U20.9 U20A.4 USB.5 Y11.1 Y11.3 | length 158.7
  Top Layer w0.127: v1(6.484,7.923) 6.484,9.327 6.868,9.712 C19.2 ; U6.47 17.644,32.279 18.707,31.216 v1(18.707,30.837) ; U6.35 25.025,31.447 25.319,31.742 25.319,32.098 v1(24.705,32.713) ; C68.2 28.615,31.225 29.6,32.21 C28.1@29.616,32.226 ; R102.1 52.625,25.468 ; v1@52.739,25.412 v1@53.238,25.412 ; v1@53.366,25.13 v1(53.366,25.175) v1@53.366,25.412
  Top Layer w0.25: v1(1.115,31.04) 1.508,31.432 C10.1 C9.1 1.749,33.413 v1(1.136,32.801) ; v1(1.199,22.788) 1.206,22.781 C8.1 ; U2.2 3.462,25.682 v1(3.856,25.288) ; v1(5.547,30.616) 6.501,30.616 R15.1 7.063,32.327 C12.1 ; v1(5.717,27.869) 5.729,27.881 7.373,27.881 7.876,27.378 U3.2 ; v1(6.66,24.233) 6.66,24.147 C11.1 ; C2.2 14.084,23.847 v1(14.37,24.133) ; C24.1 12.344,32.242 C25.1 ; v1(14.309,28.438) 14.318,28.447 U6.8 ; R209.2 27.702,22.662 28.017,22.347 28.432,22.347 28.448,22.363 v1(34.012,22.363) v1@34.099,22.276 ; v1(27.781,31.727) 27.879,31.727 C68.2 ; C29.1 29.275,25.315 U20.9 ; C28.1 29.6,32.21 30.048,32.21 30.725,31.533 U10.2 ; Y11.1 35.079,9.894 v1(35.227,10.043) ; Q6.2 Q7.2 42.459,30.328 42.924,29.862 v1(42.924,25.28) ; C30.1 49.482,26.248 54.957,26.248 55.169,26.459 54.321,27.307 SIM-C.5 55.985,27.307 56.308,26.984 56.776,26.984 ; C31.1@47.739,31.904 48.492,32.656 50.166,32.656 50.736,32.086 SIM-C.0@50.736,30.575 ; SIM-C.0@52.471,30.731 SIM-C.0@52.471,29.343 ; C205.2 v1(52.869,6.623) C206.2 ; SIM-C.0@53.705,27.923 SIM-C.0 SIM-C.0@52.471,29.343 ; C32.1 56.776,29.574 56.776,27.073 ; C33.1 56.425,33.296 SIM-C.0@52.471,29.343
  Top Layer w0.3: v1(4.135,4.777) 4.292,4.777 4.506,4.563 U4.11 5.762,4.586 v1(7.329,4.586) ; D1.2 8.266,12.525 8.555,12.814 M1.1 ; U6.23 22.144,23.789 v1(22.16,23.773)
  Top Layer w0.5: C3.2 C2.2 ; v1(18.978,2.742) 19.001,2.719 v2(19.001,1.562)
  Signal Layer 2 w0.127: 22.121,24.072 22.121,25.949 22.6,26.428 22.6,28.134 24.176,29.71 24.176,32.184 v1(24.705,32.713)
  Bottom Layer w0.25: v1(10.884,17.576) 10.897,17.589 v1(11.631,17.589) ; U1.3 U1.3@11.631,17.588 ; C4.2 v1(19.415,5.829) 22.048,5.829 22.058,5.839 v1(22.001,5.839) ; U5.72 29.895,26.865 v1(30.448,27.418) ; v1(33.941,2.798) 33.883,2.856 33.883,2.871 33.945,2.809 U5.51 ; v1(42.221,33.745) 42.245,33.722 U5.8 ; v1(43.512,33.733) 43.545,33.701 U5.9 ; U5.46 43.545,2.109 v1(43.595,2.159) ; v1(44.829,33.771) 44.845,33.755 U5.10
  Bottom Layer w0.5: U5.56 30.865,6.065 v1(32.108,4.821) ; U5.54 30.045,2.956 v1(30.062,2.974) ; v1(31.306,2.842) 31.345,2.804 U5.53 ; v1(32.624,2.813) 32.645,2.792 U5.52 ; U5.50 U5.50@35.245,2.725 ; v1@35.245,9.753 U5.50@35.245,2.725 ; v1(35.289,2.769) U5.50@35.245,2.725 ; U5.86 37.845,9.065 37.845,4.317 ; U5.48 37.845,4.317 ; v1(43.595,2.159) 43.595,3.78 43.057,4.317 37.845,4.317 ; U5.89 52.914,8.395 52.914,5.355 53.505,4.765 U5.36
  other v1: 52.739,25.175 54.094,25.177 54.074,25.716 53.387,25.749 52.758,25.756
LED: LED1.2 U6.29 | length 60.8
  Top Layer w0.127: U6.29 24.883,28.447 25.763,27.567 26.319,27.567 27.035,28.283 34.439,28.283 34.755,27.967 34.755,25.622 35.977,24.4 v1(45.158,24.4) ; LED1.2 v1(56.929,3.41)
  Signal Layer 2 w0.127: v1(45.158,24.4) 45.158,4.797 46.545,3.41 v1(56.929,3.41)
MCU-12: R11.1 U6.25 | length 9.2
  Top Layer w0.127: v1(23.585,25.299) 23.585,25.938 U6.25
  Bottom Layer w0.25: R11.1 21.05,24.219 22.13,25.299 v1(23.585,25.299)
NetC13_1: C13.1 C201.1 P2.4 | length 86.1
  Top Layer w0.127: C201.1 53.221,23.193 53.487,23.459 55.438,23.459 55.498,23.399 56.884,23.399 56.943,23.459 56.959,23.459 57.948,24.447 57.948,28.712 v1(59.337,30.101) ; C201.1@53.291,22.796 C201.1@53.291,22.808
  Top Layer w0.25: C13.1 14.961,3.567 15.236,3.842 21.295,3.842 21.749,3.388 24.241,3.388 24.695,3.842 v3(25.405,3.842)
  Signal Layer 1 w0.25: v3(25.405,3.842) 25.442,3.842 26.314,4.715 29.127,4.715 32.329,7.916 46.289,7.916 51.733,13.36 62.216,13.36 63.128,14.272 63.128,22.041 v2@63.452,22.364
  Signal Layer 2 w0.127: 58.696,22.478 57.958,23.216 57.958,28.723 v1(59.337,30.101)
  Signal Layer 2 w0.25: 58.696,22.478 62.971,22.478 v2(63.084,22.365)
NetC13_2: C13.2 C14.2 R18.2 U4.2 | length 7.2
  Top Layer w0.127: U4.2 12.632,3.263 12.926,2.969 12.926,1.252 13.236,0.941 13.811,0.941 C14.2 C13.2
NetC14_1: C14.1 R18.1 R19.2 U4.1 | length 14.2
  Top Layer w0.127: U4.1 12.268,2.613 12.507,2.374 12.507,1.027 13.053,0.481 14.711,0.481 14.955,0.725 C14.1 v1@14.955,1.841 ; R19.2 15.621,7.15 15.641,7.129 v1(15.705,7.129)
  Signal Layer 1 w0.127: v1(14.935,1.841) 16.056,1.841 16.464,2.25 16.464,6.37 v1(15.705,7.129)
NetC16_1: C16.1 R21.2 U4.6 U4.7 | length 8
  Top Layer w0.127: C16.1 R21.2 9.451,7.005 9.942,6.513 U4.7 12.405,6.513 12.528,6.39 12.528,5.975 12.416,5.863 U4.6
NetC16_2: C16.2 R19.1 R20.2 | length 6.2
  Top Layer w0.127: C16.2 10.69,9.695 11.333,9.695 ; v1(11.447,7.482) 11.447,7.792 11.3,7.939 11.3,9.663 11.333,9.695 ; R20.2@11.824,9.695 11.333,9.695 ; v1(13.731,7.147) 13.734,7.15 R19.1
  Signal Layer 1 w0.127: v1(11.447,7.482) 11.508,7.482 11.844,7.147 v1(13.731,7.147)
NetC17_1: C17.1 R20.1 U4.5 | length 6.2
  Top Layer w0.127: U4.5 11.365,5.187 12.47,5.187 13.035,5.753 13.035,8.746 11.873,8.746 R20.1@11.824,8.795
NetC18_1: C18.1 C20.2 C21.2 U4.8 U4.9 | length 10.5
  Top Layer w0.127: C21.2 3.994,10.952 4.99,9.956 4.99,9.044 ; U4.8@4.991,6.492 U4.8@4.991,6.512 ; 4.991,9.043 U4.8@4.991,6.512 ; 5.014,8.42 5.421,8.827 5.794,8.827 C18.1@5.825,8.857 ; U4.8@5.332,6.512 U4.8@4.991,6.512 ; U4.9 5.713,5.836 4.638,5.836 4.485,5.989 4.485,6.373 4.625,6.512 U4.8@4.991,6.512
NetC18_2: C18.2 R21.1 R22.2 | length 7.5
  Top Layer w0.25: C18.2@5.825,9.757 5.825,10.741 6.156,11.072 7.946,11.072 ; R22.2 8.262,10.755 7.946,11.072 ; R21.1 9.451,10.749 9.128,11.072 7.946,11.072
NetC19_1: C19.1 R22.1 U4.10 | length 7
  Top Layer w0.127: U4.10 7.785,5.213 8.262,5.69 R22.1 8.231,8.829 C19.1@7.057,8.829
NetC20_1: C20.1 C21.1 R23.2 | length 4.3
  Top Layer w0.127: R23.2 1.701,6.844 1.701,7.67 1.98,7.948 C21.1 3.895,9.052 C20.1
NetC22_1: C22.1 R25.1 R26.2 U4.14 | length 5.7
  Top Layer w0.127: R25.1 1.804,2.613 U4.14 5.737,2.61 R26.2
NetC22_2: C22.2 R23.1 R25.2 U4.13 | length 6.8
  Top Layer w0.127: R23.1 1.653,4.679 1.884,4.448 1.884,3.593 R25.2 1.828,3.263 U4.13
NetC26_2: C26.2 R30.2 U6.7 | length 3.9
  Top Layer w0.127: R30.2 13.287,29.862 C26.2 13.87,29.827 14.717,28.98 15.661,28.98 U6.7
NetC27_2: C27.2 R31.1 R122.1 U6.13 | length 7.3
  Top Layer w0.127: C27.2 13.284,28.621 13.284,26.341 R122.1 13.28,25.435 13.718,24.997 U6.13
NetC30_2: C30.2 R48.1 U5.16 | length 12.6
  Top Layer w0.127: R48.1 45.691,30.325 45.691,32.613 46.925,33.847 50.305,33.847 50.864,33.288 v1(52.675,33.288)
  Top Layer w0.3: R48.1 46.616,28.214 C30.2
NetC31_2: C31.2 R38.1 U5.17 | length 9.9
  Top Layer w0.127: C31.2 46.649,32.435 47.553,33.339 50.209,33.339 50.924,32.624 53.917,32.624 v1(53.987,32.695)
  Top Layer w0.3: R38.1 46.649,30.616 C31.2
NetC32_2: C32.2 R68.1 SIM-C.1 U5.14 | length 12.2
  Top Layer w0.127: SIM-C.1 49.721,31.348 49.903,31.53 49.856,31.578 v1(49.856,31.931)
  Top Layer w0.3: C32.2 57.68,29.636 v1@57.68,30.419
  Signal Layer 1 w0.127: v1(49.856,31.931) 56.101,31.931 57.813,30.219 v1(57.813,30.419)
  Bottom Layer w0.127: v1(49.856,31.931) 49.856,31.963 49.903,32.01 U5.14@50.045,31.869 ; U5.14 U5.14@50.045,31.869 ; U5.14@50.045,31.869 50.045,31.86 50.049,31.864 U5.14@50.045,31.869
NetC33_2: C33.2 R78.1 U5.15 | length 7.9
  Top Layer w0.127: v1(51.352,34.09) v1@51.313,34.129 ; v1@51.427,34.254 v1@51.336,34.163 ; v1@51.313,34.129 51.313,34.141 v1@51.336,34.163 ; v1@51.313,34.129 51.302,34.141 51.325,34.163 v1@51.336,34.163
  Top Layer w0.3: v1(57.667,32.762) 57.667,32.094 57.647,32.075 R78.1
  Signal Layer 1 w0.127: v1(51.352,34.09) 56.338,34.09 v1(57.667,32.762)
NetC201_2: C201.2 C202.1 R201.1 U20A.2 | length 4.9
  Top Layer w0.127: U20A.2 53.291,20.053 53.291,21.896 53.485,21.896 54.256,22.667 55.739,22.667 C202.1@55.866,22.795
NetC202_2: C202.2 R201.2 R203.1 U20A.1 | length 14.3
  Top Layer w0.127: R203.1@52.213,11.42 51.959,11.42 51.454,11.924 51.454,16.76 52.411,17.717 53.752,17.717 54.612,18.577 U20A.1 54.612,21.896 55.864,21.896 C202.2@55.866,21.895
NetC203_1: C203.1 R202.1 R203.2 U20A.6 | length 4.7
  Top Layer w0.3: U20A.6 52.072,12.354 52.067,12.35 54.528,12.35 C203.1@54.561,12.317
NetD1_1: D1.1 M1.3 pad.2@6.25,14.465 pad.2@6.199,15.481 pad.2@7.114,14.414 pad.2@7.114,15.43 R3.2 USB.1 | length 22.4
  Top Layer w0.3: D1.1 6.702,14.093 6.726,14.117
  Signal Layer 1 w0.25: v1(5.597,26.838) 7.374,25.061 7.374,15.805 6.635,15.805
  Bottom Layer w0.127: v1(5.597,26.838) 5.597,26.817 R3.2
  Bottom Layer w0.2: USB.1 5.739,16.037 5.39,15.688 5.39,13.957 5.593,13.754 7.165,13.754 7.622,14.211 7.622,15.684 7.266,16.04 USB.1@6.809,16.04
NetP2_3: C204.1 P2.1 R16.1 U20A.3 U20A.5 | length 69.3
  Top Layer w0.25: R16.1@18.588,4.584 18.802,4.37 v3(22.378,4.37) ; C204.1 52.072,21.696 U20A.3 52.072,18.968 50.751,17.647 50.751,14.574 U20A.5 50.802,11.144 52.531,9.415 56.129,9.415 58.785,12.07 v2(60.329,12.07)
  Signal Layer 1 w0.25: v3(22.378,4.37) 22.707,4.37 24.145,2.932 24.97,2.932 25.438,2.464 28.245,2.464 33.193,7.412 46.498,7.412 51.156,12.07 v2(60.329,12.07)
NetP5_2: P5.2 U6.37 | length 43.1
  Top Layer w0.127: U6.37 22.644,33.56 23.263,34.18 v1(23.267,34.18)
  Signal Layer 2 w0.127: v1(23.267,34.18) 23.52,34.432 28.374,34.432 29.728,33.079 29.728,5.336 v1(27.897,3.506)
  Bottom Layer w0.127: v2(24.081,1.562) 24.915,2.396 26.788,2.396 v1(27.897,3.506)
NetP5_3: P5.3 U6.34 | length 42.7
  Top Layer w0.127: P5.3 21.578,1.562 v1(21.738,1.722) ; U6.34 24.126,30.98 25.096,30.98 25.7,31.584 v1@25.7,32.64
  Signal Layer 2 w0.127: v1(25.651,32.64) 26.041,33.03 26.555,33.03 27.018,32.567 28.579,32.567 29.347,31.799 29.347,6.143 v1(26.644,3.441)
  Bottom Layer w0.127: v1(21.738,1.722) 22.969,2.953 26.157,2.953 v1(26.644,3.441)
  other v2: 21.475,1.609
NetQ1_1: Q1.2 R1.1 R3.1 | length 3.7
  Bottom Layer w0.127: Q1.2 7.336,27.327 7.083,27.075 7.083,26.372 R3.1 7.012,25.708 R1.1
NetQ1_2: Q1.1 R4.2 | length 1.6
  Bottom Layer w0.127: R4.2 7.303,29.822 Q1.1
NetQ2_2: Q2.1 R5.1 | length 1.6
  Bottom Layer w0.127: Q2.1 11.563,29.811 R5.1
NetQ2_3: Q2.3 R2.1 | length 4.3
  Bottom Layer w0.127: R2.1 9.349,25.653 9.602,25.906 9.602,28.779 Q2.3
NetQ3_2: Q3.1 R11.2 R12.1 | length 3.1
  Bottom Layer w0.25: Q3.1 14.237,25.113 R12.1 16.201,25.113 R11.2
NetQ3_3: Q3.3 R10.1 U1.5 | length 4.2
  Bottom Layer w0.127: R10.1 11.35,24.907 Q3.3
  Bottom Layer w0.25: U1.5 11.35,21.339 R10.1
NetQ6_3: Q6.3 U5.20 | length 24
  Top Layer w0.127: Q6.3 41.821,31.278 42.574,32.031 44.678,32.031 45.307,31.402 45.307,29.957 45.963,29.3 45.963,27.798 46.428,27.333 47.481,27.333 50.413,24.401 54.763,24.401 v1(55.936,25.574)
  Bottom Layer w0.127: v1(55.936,25.574) 57.435,25.574 57.438,25.577 57.451,25.565 U5.20
NetQ7_3: Q7.3 U5.21 | length 19.9
  Top Layer w0.127: Q7.3 44.631,31.278 44.926,30.982 44.926,29.688 45.582,29.032 45.582,27.519 46.186,26.915 47.294,26.915 50.236,23.974 55.528,23.974 v1(56.044,24.49)
  Bottom Layer w0.127: v1(56.044,24.49) 57.15,24.49 57.29,24.35 57.352,24.412 U5.21@57.5,24.265 ; U5.21 U5.21@57.5,24.265 ; U5.21@57.5,24.265 57.508,24.256 57.517,24.265 U5.21@57.5,24.265
NetR1_2: R1.2 USB.3 | length 8.4
  Bottom Layer w0.127: USB.3 7.284,17.327 7.749,17.792 7.749,21.907 8.485,22.644 8.485,23.335 R1.2
NetR2_2: R2.2 USB.2 | length 9.1
  Bottom Layer w0.127: USB.2 6.223,16.81 7.305,16.81 8.13,17.635 8.13,21.679 8.943,22.491 8.943,23.355 R2.2
NetR8_1: R8.1 R9.2 U1.1 | length 3.1
  Bottom Layer w0.25: U1.1 11.02,14.167 R9.2
NetR13_1: R13.1 U2.3 | length 8.1
  Top Layer w0.3: R13.1 1.272,24.809 1.272,27.267 1.78,27.775 4.218,27.775 4.412,27.581 U2.3
NetR14_1: R14.1 U3.3 | length 5.5
  Top Layer w0.127: R14.1 5.626,24.712 5.833,24.92 6.901,24.92 6.906,24.924 8.531,24.924 8.826,25.219 U3.3
NetR17_2: R17.2 U4.3 | length 3
  Top Layer w0.127: U4.3 13.152,3.913 R17.2
NetR24_2: R24.2 U4.12 | length 4.6
  Top Layer w0.127: R24.2 2.858,4.276 3.116,4.018 5.634,4.018 U4.12
NetR29_1: R29.1 U6.44 | length 8.5
  Top Layer w0.127: U6.44 19.144,32.499 20.457,31.186 20.651,31.186 21.012,30.824 21.012,29.633 20.846,29.8 v1(20.834,29.8)
  Bottom Layer w0.127: R29.1 20.018,31.238 20.412,31.238 20.599,31.238 21.012,30.824 21.012,29.633 20.846,29.8 v1(20.834,29.8)
NetR32_2: R32.2 U6.20 | length 3.3
  Top Layer w0.127: U6.20@20.622,25.018 U6.20
  Top Layer w0.25: v1(20.065,26.858) 20.045,26.878 20.106,26.878 20.644,26.34 U6.20
  Bottom Layer w0.25: R32.2 20.015,26.908 v1(20.065,26.858)
NetR38_2: R38.2 SIM-C.2 | length 2.5
  Top Layer w0.3: R38.2 47.606,30.493 48.508,30.493 49.195,29.807 SIM-C.2
NetR48_2: R48.2 SIM-C.3 | length 2.6
  Top Layer w0.3: R48.2 48.512,29.4 49.356,28.557 SIM-C.3
NetR68_2: R68.2 R78.2 SIM-C.7 | length 3.2
  Top Layer w0.3: SIM-C.7 56.274,30.859 R68.2 R78.2
NetR204_1: R204.1 R207.1 U20.15 | length 3.6
  Top Layer w0.127: R204.1 R207.1 29.369,13.043 29.641,13.315 U20.15
NetR205_1: R205.1 R206.1 U20.16 | length 3.5
  Top Layer w0.127: R206.1 28.602,10.864 29.23,10.864 29.681,11.315 U20.16
NetR208_1: R208.1 U20.12 | length 2.3
  Top Layer w0.127: R208.1 28.641,19.315 U20.12
NetR209_1: R209.1 U20.10 | length 2.3
  Top Layer w0.127: R209.1 28.715,23.315 U20.10
NetU5_49: U5.49 Y11.2 | length 4.8
  Bottom Layer w0.5: v2@36.527,6.388 v2(36.545,6.37) U5.49
PWRKEY: Q7.1 U6.39 | length 26.6
  Top Layer w0.127: v1(21.288,31.422) 21.288,32.018 21.611,32.341 21.611,33.259 21.644,33.291 U6.39 ; v1(25.745,29.283) 26.388,29.283 26.58,29.091 34.765,29.091 36.116,30.443 36.116,32.407 36.721,33.012 40.509,33.012 Q7.1
  Signal Layer 1 w0.127: v1(21.288,31.422) 21.393,31.316 21.393,30.653 22.538,29.508 23.259,29.508 23.485,29.283 v1(25.745,29.283)
RESET_N: Q6.1 U6.40 | length 23.4
  Top Layer w0.127: v1(20.623,31.965) 20.696,31.965 21.144,32.412 U6.40 ; v1(25.838,28.429) 26.395,28.429 26.677,28.71 34.923,28.71 36.497,30.285 36.497,31.937 36.788,32.228 Q6.1
  Signal Layer 1 w0.127: v1(20.623,31.965) 20.67,31.918 20.67,31.166 21.012,30.824 21.012,30.495 22.38,29.127 23.101,29.127 23.327,28.902 25.253,28.902 25.726,28.429 v1(25.838,28.429)
RXD: R37.2 U6.21 U10.1 | length 21.4
  Top Layer w0.127: v1(21.037,26.92) 21.037,27.066 21.144,26.96 U6.21 ; v1(28.167,33.305) 28.167,33.385 28.399,33.617 R37.2 31.919,32.183 U10.1
  Signal Layer 1 w0.127: v1(28.167,33.305) 28.167,33.496 28.348,33.677
  Signal Layer 2 w0.127: v1(21.037,26.92) 21.192,26.92 21.838,27.565 21.838,28.449 23.414,30.025 23.414,33.453 23.999,34.039 27.875,34.039 28.167,33.747 v1(28.167,33.305)
TXD: R36.2 U6.22 U10.8 | length 23
  Top Layer w0.127: U6.22 21.644,26.345 v1(21.914,26.616) ; v1(27.11,33.348) 28.02,34.259 34.448,34.259 34.907,33.8 R36.2 34.907,32.272 U10.8
  Signal Layer 2 w0.127: v1(21.914,26.616) 21.914,27.103 22.219,27.407 22.219,28.291 23.795,29.868 23.795,33.295 24.157,33.658 26.8,33.658 v1(27.11,33.348)
USB-RX: Q1.3 R6.2 U6.31 | length 30.8
  Top Layer w0.127: v1(22.748,30.276) 22.748,29.973 22.733,29.958 23.244,29.447 U6.31
  Signal Layer 1 w0.127: v1(5.609,29.762) 6.444,29.762 7.298,30.616 v1(7.298,33.33)
  Bottom Layer w0.127: Q1.3 5.596,28.839 8.038,28.839 8.706,29.507 10.308,29.507 10.938,28.876 12.15,28.876 16.373,33.099 21.887,33.099 23.306,31.68 23.306,30.849 22.748,30.291 v1(22.748,30.276)
  Bottom Layer w0.25: Q1.3@5.596,28.839 5.623,28.866 5.623,29.749 v1(5.609,29.762) ; v1(7.298,33.33) 7.298,33.275 7.307,33.265 7.303,33.261 R6.2
USB-TX: Q2.2 R7.2 U6.30 | length 24.9
  Top Layer w0.127: v1(22.689,31.26) 22.689,31.105 22.116,30.532 22.116,30.454 22.13,30.439 22.13,30.006 23.157,28.98 24.061,28.98 U6.30
  Signal Layer 1 w0.127: v1(10.975,28.19) 11.261,28.476 v1(11.261,33.546)
  Bottom Layer w0.127: v1(10.975,28.19) 12.144,28.19 16.672,32.718 21.729,32.718 22.67,31.777 22.67,31.26 v1(22.689,31.26) ; v1(11.261,33.546) 11.57,33.238 R7.2
VBAT_M: C4.1 C5.1 C6.2 C7.2 pad.2@10.721,15.887 pad.2@11.381,15.887 pad.2@12.041,15.887 pad.2@16.471,10.581 pad.2@16.486,9.449 pad.2@17.985,10.147 pad.2@19.611,10.147 R8.2 U1.2 U5.57 U5.58 U5.59 U5.60 WF1.2 | length 65.8
  Top Layer w0.5: pad.2@19.611,10.147 20.585,9.173 23.895,9.173 24.897,8.171 WF1.2
  Signal Layer 2 w0.254: 12.574,16.32 12.574,11.77 12.978,11.366 20.779,11.366 21.389,10.757 21.389,10.147
  Signal Layer 2 w0.5: pad.2@19.611,10.147 21.389,10.147
  Bottom Layer w0.25: R8.2 11.889,12.9 11.906,12.884 v1(11.913,12.884)
  Bottom Layer w0.254: 25.774,7.935 26.37,8.531 26.37,8.597 ; 25.906,7.336 25.266,7.336 24.233,8.369 23.812,8.369 14.327,8.369 13.819,8.877 13.819,10.807 14.277,11.265 U5.60
  Bottom Layer w0.5: 23.845,8.945 25.426,7.365 U5.57 ; 25.803,8.659 25.809,8.665 U5.58 ; 26.175,9.956 26.184,9.965 U5.59
WIFI_3V3: C205.1 C206.1 R27.1 R204.2 R205.2 R208.2 U20.1 U20.8 WF1.1 | length 72.8
  Top Layer w0.127: WF1.1 25.879,5.744 25.879,10.242 26.343,10.706 R205.2 ; R204.2 27.702,15.615 ; R208.2 27.702,17.067 28.428,16.341 ; R27.1 49.162,5.366 49.321,5.524 C205.1
  Top Layer w0.25: U20.8 47.432,25.315 48.66,24.087 48.66,12.06 47.915,11.315
  Top Layer w0.3: 27.702,15.615 28.428,16.341 33.359,16.341 34.639,15.061 34.639,11.315
  Top Layer w0.5: WF1.1@26.147,5.648 28.971,5.648 34.639,11.315 U20.1 47.915,11.315 48.789,11.315 50.969,9.135 C206.1 C205.1
WIFI_EN: U6.28 U20.3 | length 33.6
  Top Layer w0.127: U6.28 24.126,27.915 24.975,27.915 25.331,27.559 25.331,26.324 26.136,25.519 v1(26.178,25.519) ; v1@26.178,25.549 v1@26.251,25.549
  Top Layer w0.25: v1@26.251,25.549 26.267,25.533 27.437,25.533 28.31,26.406 32.165,26.406 34.746,23.825 41.124,23.825 41.976,22.973 41.976,15.973 42.633,15.315 U20.3
WIFI_RX: R206.2 U6.46 | length 26.9
  Top Layer w0.127: U6.46 18.144,32.332 19.559,30.916 19.559,30.477 v1(19.541,30.458) ; v1(24.524,24.546) 25.056,24.546 26.647,22.955 26.647,13.029 27.702,11.974 R206.2
  Signal Layer 1 w0.127: v1(19.541,30.458) 19.836,30.164 19.836,29.386 20.42,28.801 21.616,28.801 22.097,28.32 22.766,28.32 24.202,26.883 24.202,24.867 v1(24.524,24.546)
WIFI_TX: R207.2 U6.45 | length 25.6
  Top Layer w0.127: U6.45 18.644,32.37 20.395,30.619 v1(20.395,30.568) ; v1(24.82,25.445) 27.028,23.237 27.028,13.319 27.304,13.043 R207.2
  Signal Layer 1 w0.127: v1(20.395,30.568) 20.217,30.39 20.217,29.544 20.578,29.182 21.773,29.182 22.255,28.701 22.987,28.701 24.82,26.868 v1(24.82,25.445)
pads on no net: SIM-C.4 SIM-C.6 SIM-C.8 U1.6 U2.4 U3.4 U5.1 U5.2 U5.3 U5.4 U5.5 U5.6 U5.7 U5.11 U5.12 U5.13 U5.18 U5.23 U5.24 U5.25 U5.26 U5.27 U5.28 U5.29 U5.30 U5.31 U5.32 U5.33 U5.34 U5.35 U5.37 U5.38 U5.39 U5.40 U5.41 U5.42 U5.43 U5.44 U5.45 U5.47 U5.55 U5.61 U5.62 U5.63 U5.64 U5.65 U5.66 U5.69 U5.70 U5.71 U5.73 U5.74 U5.75 U5.76 U5.77 U5.78 U5.79 U5.80 U5.81 U5.82 U5.83 U5.84 U5.113 U5.114 U5.115 U5.116 U5.117 U5.118 U5.119 U5.120 U5.121 U5.122 U5.123 U5.124 U5.125 U5.126 U5.127 U5.128 U5.129 U5.130 U5.131 U5.132 U5.133 U5.134 U5.135 U5.136 U5.137 U5.138 U5.139 U5.140 U5.141 U5.142 U5.143 U5.144 U6.2 U6.3 U6.4 U6.5 U6.6 U6.10 U6.11 U6.12 U6.15 U6.16 U6.17 U6.18 U6.19 U6.26 U6.27 U6.32 U6.33 U6.38 U6.41 U6.42 U6.43 U10.6 U20.2 U20.4 U20.5 U20.6 U20.7 U20.11 U20.13 U20.14 U20.17 U20.18 U20.19 U20.20 U20.21 U20.22 USB.4

## Polygon pours and split planes (outlines as drawn)
no net on Top Layer "xx" (solid, remove dead copper, pour order 0): 18.468,37.452
GND on Top Layer "Top Layer-No Net" (solid, remove dead copper, pour order 58): -2.65,38.549 -3.953,37.247 -3.953,-6.074 32.59,-6.074 36.38,-2.284 36.38,7.274 36.922,7.816 37.465,8.359 66.889,8.359 66.889,19.795 68.225,21.13 67.682,21.673 67.682,36.865 65.22,36.865 60.921,41.164 59.961,42.124 33.041,42.124 1.247,42.124 -4.578,36.299
no net on Bottom Solder "xx" (solid): 24.868,22.949
no net on Signal Layer 1 "NETFB1_1_L01_P-001" (solid, remove dead copper, pour order 2): 39.42,15.124
GND on Signal Layer 1 "Top Layer-No Net" (solid, remove dead copper, pour order 64): -3.893,36.933 -3.893,-2.928 -2.202,-4.62 -1.834,-4.252 36.998,-4.252 36.998,6.559 38.027,7.589 38.468,8.03 73.035,8.03 73.035,31.564 74.873,33.403 67.372,40.904 67.372,43.626 27.143,43.626 23.171,39.654 20.597,37.08 -3.526,37.08
GND on Bottom Layer "Top Layer-No Net" (solid, remove dead copper, pour order 60): -9.556,42.375 -6.468,39.286 -6.468,-3.149 35.821,-3.149 36.483,-2.487 37.071,-1.899 37.071,7.736 37.586,8.25 68.843,8.25 68.843,28.402 71.637,31.196 67.004,35.83 67.004,43.258 11.33,43.258 3.24,51.348 -6.541,41.566 -6.541,41.125
GND on Signal Layer 2 "Top Layer-No Net" (solid, remove dead copper, pour order 62): -2.275,38.551 -2.275,-4.473 -3.746,-5.944 -2.496,-4.693 36.777,-4.693 36.777,7.074 37.88,8.177 37.953,8.103 81.786,8.103 81.786,24.21 74.138,31.858 68.548,37.448 68.548,40.831 20.671,40.831 17.287,44.214 11.551,38.477 -3.232,38.477

## Keep-outs
Keep-Out Layer:
  circle w0.2: c61.203,27.225 r2.745
  circle w0.2: c61.203,7.225 r2.648
  lines w0.2: 0.027,28.791 0.027,21.162 4.925,21.162 ; 0.038,1.765 0.038,7.48 ; 0.042,7.251 0.042,13.5 ; 0.042,28.308 0.042,32.987 ; 0.049,1.733 ccw(c2.154,1.827) 2.248,-0.277 ; 0.049,13.511 4.929,13.511 ; 0.058,32.987 cw(c2.063,32.982) 2.068,34.987 ; 2.049,-0.277 58.266,-0.277 ccw(c58.53,6.423) 65.231,6.159 65.241,27.876 ccw(c58.365,28.113) 58.603,34.988 2.049,34.998 ; 4.936,13.583 4.936,21.105 ; 13.056,23.185 24.614,23.215 24.643,12.029 13.085,11.998 13.056,23.185

## Other copper
Top Layer:
  rectangle net GND: 0.468,30.805 0.699,33.017
  rectangle net GND: 6.31,30.459 7.023,31.135
  rectangle net GND: 6.472,16.334 7.145,18.382
  rectangle net GND: 6.063,16.736 6.874,18.338
  rectangle net GND: 0.558,30.182 1.712,33.515
  rectangle net GND: 1.069,30.519 2.98,31.226
  rectangle net GND: 1.501,30.789 3.195,34.386
  rectangle net GND: 47.569,31.796 48.354,32.529
  rectangle net GND: 51.729,24.736 54.627,26.005
  rectangle net GND: 50.561,24.712 51.514,26.591
  rectangle net GND: 50.573,26.341 54.737,27.7
  rectangle net VBAT_M: 15.85,8.922 20.628,11.123
  rectangle net NetD1_1: 5.59,13.805 7.469,16.091
  region net GND: 7.417,19.596 5.758,21.255 5.758,21.292 5.288,21.292 5.17,21.174 5.354,20.991 5.354,18.389 5.993,18.389 6.192,18.191 6.361,18.36 6.853,18.36 6.853,18.404 7.161,18.713 7.161,19.197
  region net GND: 54.239,27.34 54.239,26.839 54.949,26.128 57.357,26.128 57.357,27.206 57.166,27.397 56.461,27.397 56.444,27.38 55.957,27.866 53.985,27.866
  region net DC5V: 7.825,19.85 7.723,19.85 5.844,21.729 3.609,21.729 2.796,22.542 3.034,22.781 6.825,22.781 8.689,20.917 8.689,20.356 8.081,19.748
  region net DC5V: 7.825,15.43 8.028,15.227 9.044,15.227 9.552,15.735 9.552,17.869 10.111,18.427 12.295,18.427 12.601,18.734 12.601,20.001 12.295,20.307 8.282,20.307 7.825,19.85
Signal Layer 1:
  rectangle net GND: 51.65,24.289 54.698,26.546
  rectangle net NetD1_1: 5.59,13.805 7.504,15.932
  region net GND: 5.335,21.635 5.335,17.526 5.67,17.192 6.255,17.777 6.935,17.777 6.935,21.599 6.673,21.862
Signal Layer 2:
  rectangle net GND: 10.188,17.053 12.264,18.298
  rectangle net GND: 30.973,3.808 33.837,5.8
  rectangle net GND: 29.261,1.948 36.604,3.841
  rectangle net GND: 40.871,32.553 45.953,34.459
  rectangle net GND: 51.418,24.297 54.733,27.172
  rectangle net GND: 5.347,17.861 7.413,21.85
  rectangle net NetD1_1: 5.59,13.805 7.419,16.091
  region net VBAT_M: 9.959,16.751 9.654,16.446 9.654,11.112 12.143,8.623 20.779,8.623 21.389,9.233 21.389,10.757 20.779,11.366 12.978,11.366 12.978,11.521 12.574,11.925 12.574,16.32 12.143,16.751
Bottom Layer:
  rectangle net GND: 13.876,23.913 15.089,24.377
  rectangle net GND: 50.313,24.022 54.913,27.086
  rectangle net GND: 17.73,0.58 20.099,3.697
  rectangle net GND: 6.744,23.534 7.222,24.86
  rectangle net GND: 6.123,23.928 6.756,24.92
  rectangle net GND: 4.284,21.707 6.852,24.322
  rectangle net GND: 5.216,18.589 7.127,21.898
  rectangle net GND: 31.259,3.892 33.199,5.84
  region net VBAT_M: 14.277,11.265 25.862,11.265 26.459,10.667 26.459,7.877 25.856,7.274 25.77,7.36 25.242,7.36 24.233,8.369 24.155,8.29 14.316,8.29 14.316,8.38 13.819,8.877 13.819,10.807
  region net NetD1_1: 5.739,16.037 5.39,15.688 5.39,13.957 5.593,13.754 7.165,13.754 7.622,14.211 7.622,15.684 7.266,16.04 7.263,16.037

## Silkscreen, mask and mechanical layers (free items; w line width, h text height)
Top Overlay:

## Text inside footprints (layer, text, board x,y; h text height)
U20: Top Overlay "ESP12F" at 33.326,20.706 h2.03